# Altium PCB PCB1.PcbDoc
Units mm, origin at the board's own origin, x right, y up, seen from the top; angles counter-clockwise.
Board outline 17.45 x 12.35 mm, 2 copper layers (Top Layer, Bottom Layer); 9 components, 7 nets, 26 pads, 2 vias.
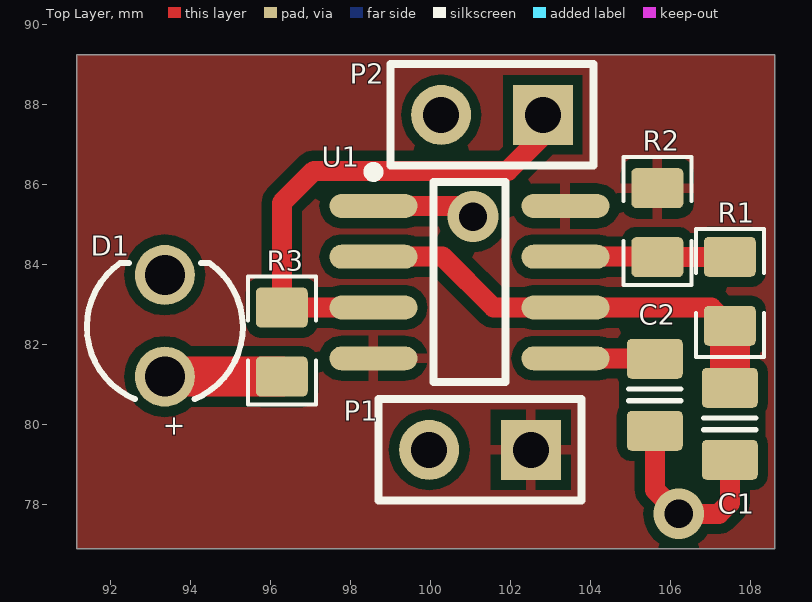
[diagram p0: Top Layer view]
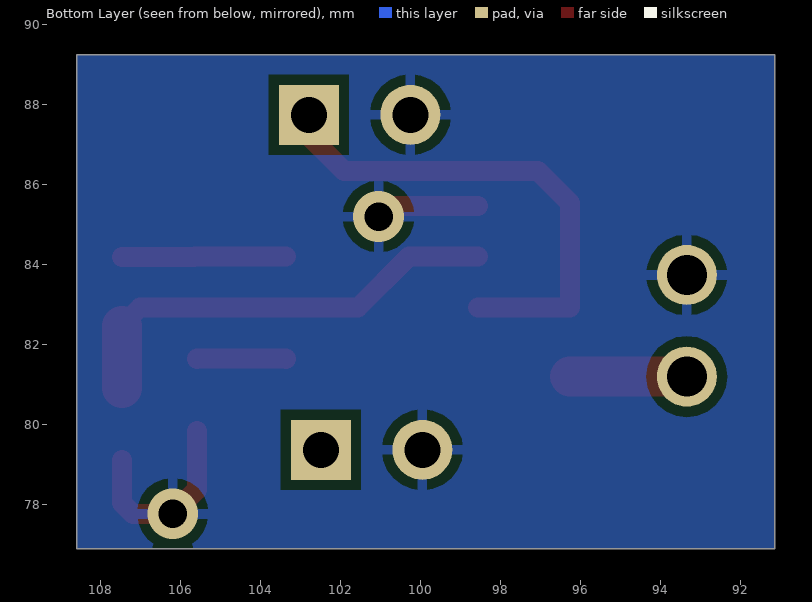
[diagram p1: Bottom Layer view, seen from below]
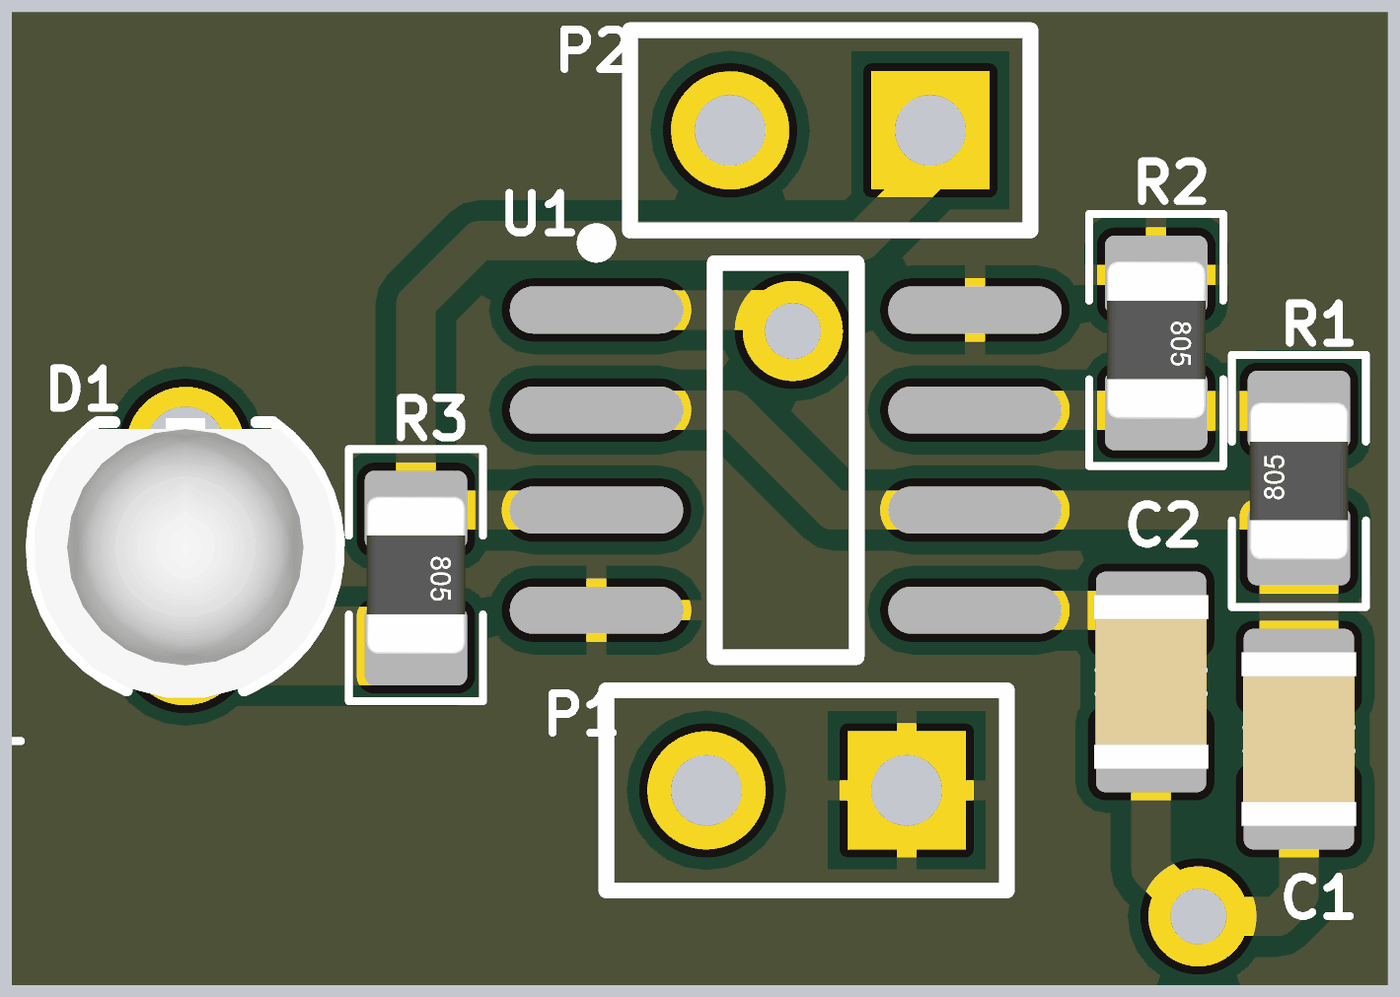
[diagram p2: 3D render of the assembled board from above, using the file's embedded part models]

## Layer stack, top to bottom
Top Solder: solder mask 0.0102, Solder Resist, Dk 3.5
Top Layer: signal copper 0.0356
Dielectric 1: dielectric 0.32, FR-4, Dk 4.8
Bottom Layer: signal copper 0.0356
Bottom Solder: solder mask 0.0102, Solder Resist, Dk 3.5

## Board outline
91.15,76.9 91.15,89.25 108.6,89.25 108.6,76.9

## Design rules (kind name [scope] priority, off if disabled: settings)
Clearance [All] p1: gap=0.254
PolygonConnect [All] p1: connectstyle=Relief reliefconductorwidth=0.254 reliefentries=4 polygonreliefangle="90 Angle" airgapwidth=0.254
RoutingVias [All] p1: holewidth=0.711 width=1.27 viastyle="Through Hole" minholewidth=0.711 minwidth=1.27 maxholewidth=0.711 maxwidth=1.27
SolderMaskExpansion [All] p1: expansion=0.102
Width [All] p1: maxlimit=1 minlimit=0.3 preferedwidth=0.5
30 further rules are at their usual default settings.

## Components (designator, comment, footprint, x,y, rotation, side; value= is the part's Value field where it differs from the comment)
C1 "approved sub OK" CAPC2012X135N 107.475,80.025 r90 top
C2 "approved sub OK" CAPC2012X135N 105.6,80.75 r90 top
D1 "Super Red, 2 V, 40°" "WL-TMRC_3 mm_without stopper" 93.35,82.475 r90 top
P1 "Header 2" HDR1X2 102.5,79.375 r180 top
P2 "Header 2" HDR1X2 102.8,87.75 r180 top
R1 "Thick Film" RESC2012X70N 107.475,83.3 r90 top
R2 "Thick Film" RESC2012X70N 105.664,85.09 r270 top
R3 "Thick Film" RESC2012X70N 96.275,82.106 r270 top
U1 "NE555D" D008_N 100.965,83.566 r0 top

## Footprints (in the part's own frame and the unit in brackets; to place one, negate y for a bottom-side part, rotate by r counter-clockwise, add the part's x,y. Pads: shape width x height; smd on the part's side, far side on the other; paste and mask are expansions set on the pad)
CAPC2012X135N [mm] "Chip Capacitor, Body 2.0x1.2mm, EIA 0805, IPC Medium Density"
  round 0.254 on Mech15: 0(0,0)
  rrect25% 1x1.4 smd: 1(-0.9,0) 2(0.9,0)
  Top Layer pour cut-out: -0.675,0.7 -0.475,0.9 0.475,0.9 0.675,0.7 0.675,-0.7 0.475,-0.9 -0.475,-0.9 -0.675,-0.7
  silkscreen extent -0.15,-0.65 0.15,0.65, body extent -1.1,-0.72 1.1,0.73, height 1.34
D008_N [mm] "SOIC, 8-Leads, Body 4.9x3.9mm, Pitch 1.27mm, IPC Medium Density"
  oval 2.2x0.6 smd: 1(-2.4,1.905) 2(-2.4,0.635) 3(-2.4,-0.635) 4(-2.4,-1.905) 5(2.4,-1.905) 6(2.4,-0.635) 7(2.4,0.635) 8(2.4,1.905)
  silkscreen extent -2.52,-2.5 0.9,2.88, body extent -1.95,-2.45 1.95,2.45, height 1.75
HDR1X2 [mm] "Connector; Header; 2 Position"
  rect 1.5x1.5 hole 0.9: 1(0,0)
  round 1.5 hole 0.9: 2(2.54,0)
  silkscreen extent -1.27,-1.27 3.81,1.27
RESC2012X70N [mm] "Chip Resistor, Body 2.0x1.2mm, EIA 0805, IPC Medium Density"
  rrect25% 1x1.3 smd: 1(-0.825,0) 2(0.9,0)
  silkscreen extent -1.6,-0.85 1.6,0.85, body extent -1,-0.62 1,0.63, height 0.78
"WL-TMRC_3 mm_without stopper" [mm] "THT Mono-color Round Color LED, 2-leads"
  round 1.5 hole 1: 1(1.27,0) 2(-1.27,0)
  silkscreen extent -1.83,-1.95 1.57,1.95, body extent -1.94,-1.92 1.63,1.92, height 5.4

## Part data
C1 C2: library part CAPC_10u_0805_10V, "Capacitor SMD Cer 10uF 10% 10V X5R 0805"
D1: library part 151031SS04000, "WL-TMRC THT Mono-color Round Color, 3 mm, without stopper, Super Red, 40°, 2 V"
P1 P2: "Header, 2-Pin"
R1: library part RES_10K_0805_1%, "Resistor SMD chip 10k Ohm 0.125W 1% 0805"
R2 R3: library part RES_1K_0805_1%, "Resistor SMD chip 1k Ohm 0.125W 1% 0805"
U1: "Precision Timer"

## Via types
v1: diameter 1.27, hole 0.711, Top Layer to Bottom Layer, 2 vias

## Nets (pads, with @x,y where several pads share a name; then routed paths per layer and width w, separated by ;. In a path a pad name is that pad's centre, name@x,y a point inside that pad or via, vN(x,y) a via of type N, cw(c..) or ccw(c..) an arc to the next point about the centre after c; other vN are vias at no path point)
GND: C1.1 C2.1 D1.1 P1.2 P2.2 U1.1 | length 7.4
  Top Layer w0.5: U1.1 100.788,85.471 v1(101.055,85.204) ; C2.1 105.6,78.375 v1(106.2,77.775) 107.2,77.775 107.475,78.05 C1.1
  Bottom Layer w0.5: v1(101.055,85.204) v1@101.076,85.225
NetC1_2: C1.2 R1.1 U1.2 U1.6 | length 11.2
  Top Layer w0.5: U1.2 100.299,84.201 101.569,82.931 U1.6 107.019,82.931 R1.1
  Top Layer w1: C1.2 R1.1
NetC2_2: C2.2 U1.5 | length 2.3
  Top Layer w0.5: U1.5@103.376,81.65 U1.5 105.589,81.661 C2.2
NetD1_2: D1.2 R3.2 | length 2.9
  Top Layer w1: D1.2 93.351,81.206 R3.2
NetP2_1: P2.1 R3.1 U1.3 | length 12.7
  Top Layer w0.5: U1.3 R3.1 96.275,85.55 97.075,86.35 101.925,86.35 102.8,87.225 P2.1
NetR1_2: R1.2 R2.2 U1.7 | length 4.1
  Top Layer w0.5: U1.7 105.653,84.201 R2.2 R1.2@107.465,84.19
VCC: P1.1 R2.1 U1.4 U1.8
pads on no net: C1.0 C2.0

## Polygon pours and split planes (outlines as drawn)
VCC on Top Layer "Top Layer-Vcc" (solid, pour order 4): 91.15,89.25 108.6,89.25 108.6,76.9 91.15,76.9 91.15,89.25
GND on Bottom Layer "Bottom Layer-GND" (solid, pour order 6): 91.15,89.25 108.6,89.25 108.6,76.9 91.15,76.9 91.15,89.25

## Silkscreen, mask and mechanical layers (free items; w line width, h text height)
Drill Drawing:
  the board outline again, w0.254

## Text inside footprints (layer, text, board x,y; h text height)
D1: Top Overlay "+" at 93.8,79.675 h0.5 r90